# Allegro board BAROTECH.brd
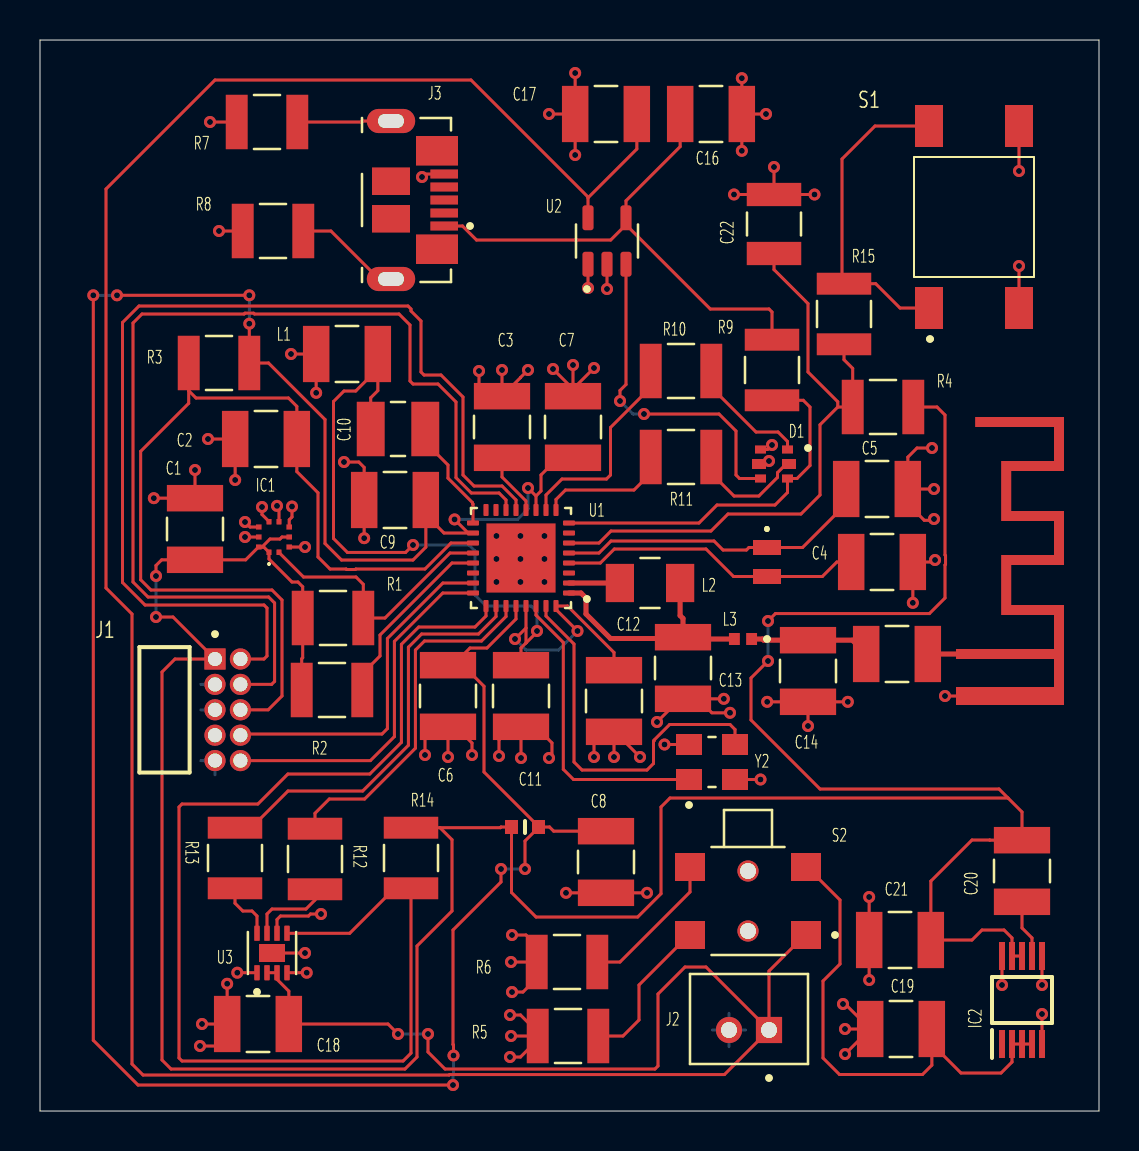
[diagram p0: board, top side]
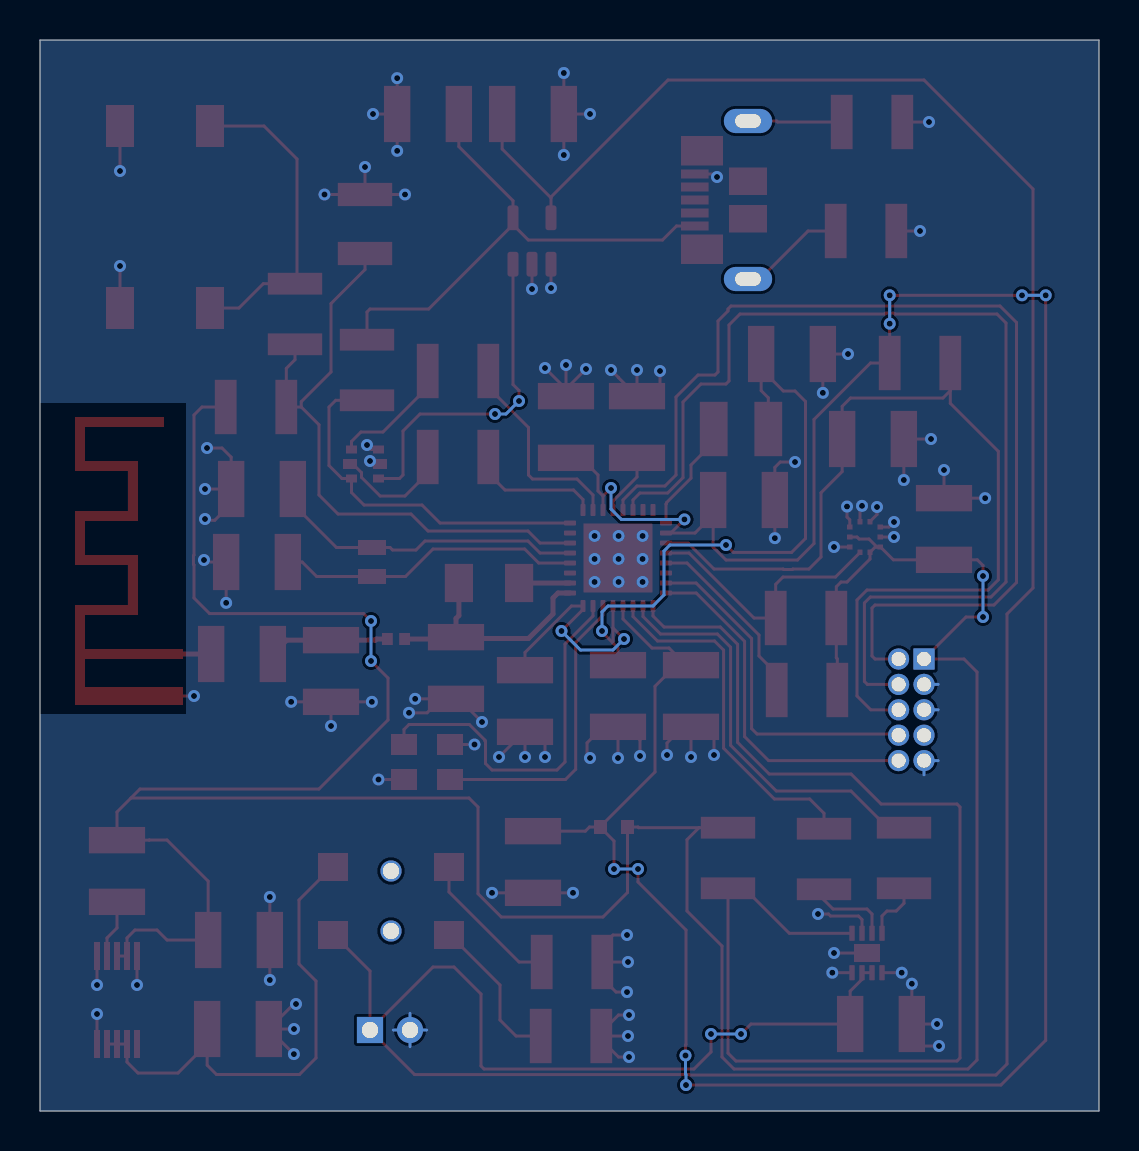
[diagram p1: board, bottom side, seen from below]

Outline 52.95 x 53.55 mm; copper layers: TOP, BOTTOM. Coordinates in mm from the lower left corner of the outline.
Outline path: 0,53.55 52.95,53.55 52.95,0 0,0 0,53.55

## Design rules (mm)
constraint set DEFAULT: min track width 0.15

## Placement (name value [footprint] x y rotation side)
A1  AN043  [AN043_PATCH_ANTENNA]  46.3 19.8 270 top
C1  100 nF  [CAPC3325X127N]  7.75 29.1 270 top
C2  100 nF  [CAPC3325X127N]  11.3 33.6 0 top
C3  1 uF  [CAPC3325X127N]  23.1 34.2 90 top
C4  12 pF  [CAPC3325X127N]  42.1 27.45 0 top
C5  12 pF  [CAPC3325X127N]  41.85 31.1 0 top
C6  100 nF  [CAPC3325X127N]  20.4 20.75 90 top
C7  100 nF  [CAPC3325X127N]  26.65 34.2 270 top
C8  10 uF  [CAPC3325X127N]  28.3 12.45 90 top
C9  100 nF  [CAPC3325X127N]  17.75 30.55 0 top
C10  10 uF  [CAPC3325X127N]  15.35 37.85 0 top
C11  100 nF  [CAPC3325X127N]  24.05 20.75 90 top
C12  100 nF  [CAPC3325X127N]  28.7 20.5 90 top
C13  1.2 pF  [CAPC3325X127N]  32.15 22.15 90 top
C14  1.2 pF  [CAPC3325X127N]  38.4 22 90 top
C15  12 pF  [CAPC3325X127N]  42.85 22.85 0 top
C16  1 uF  [CAPC3325X127N]  33.55 49.85 180 top
C17  1 uF  [CAPC3325X127N]  28.3 49.85 0 top
C18  100 nF  [CAPC3325X127N]  10.9 4.35 180 top
C19  10 uF  [CAPC3325X127N]  43.05 4.1 0 top
C20  330 nF  [CAPC3325X127N]  49.1 12 90 top
C21  10 uF  [CAPC3325X127N]  43 8.55 0 top
C22  100 nF  [CAPC3225X88N]  36.7 44.35 90 top
D1  LED RGB  [LED_19-337CRSBHGHC-A884T]  36.7 32.35 0 top
FB1  BLM18HE152SN1D  [BLM18SP221SN1B]  24.25 14.2 180 top
IC1  -  [BMP390]  11.7 28.7 180 top
IC2  MAX1759EUB+  [SOP50P490X110-10N]  49.1 5.55 90 top
J1  FTSH-105-01-L-D-RA-K  [SAMTEC_FTSH-105-01-L-D-RA-K]  8.75 22.6 90 top
J2  B2B-PH-K-S  [JST_B2B-PH-K-S]  35.45 4.6 0 top
J3  105164-0001  [MOLEX_105164-0001]  16.1 45.55 270 top
L1  10 uH  [INDC3225X170N]  17.9 34.1 180 top
L2  15 nH  [INDM3225X240N]  30.5 26.4 0 top
L3  2 nH  [INDC1005X55N]  35.15 23.6 0 top
R1  10 kOhm  [RESC3225X60N]  14.65 24.65 0 top
R2  10 kOhm  [RESC3225X60N]  14.6 21.05 180 top
R3  100 kOhm  [RESC3225X60N]  8.95 37.4 0 top
R4  10 kOhm  [RESC3225X60N]  42.15 35.2 0 top
R5  33 kOhm  [RESC3225X60N]  26.4 3.75 0 top
R6  33 kOhm  [RESC3225X60N]  26.35 7.45 180 top
R7  33 kOhm  [RESC3225X60N]  11.35 49.45 0 top
R8  33 kOhm  [RESC3225X60N]  11.65 44 0 top
R9  200 Ohm  [RESC3225X60N]  36.6 37.05 270 top
R10  82 Ohm  [RESC3225X60N]  32.05 37 180 top
R11  110 Ohm  [RESC3225X60N]  32.05 32.7 180 top
R12  22 Ohm  [RESC3225X60N]  13.75 12.6 270 top
R13  22 Ohm  [RESC3225X60N]  9.75 12.65 270 top
R14  3.3 kOhm  [RESC3225X60N]  18.55 12.65 90 top
R15  330 Ohm  [RESC3225X60N]  40.2 39.85 270 top
S1  -  [LL3301NF065QG]  46.7 44.7 90 top
S2  TL3901AGQF180  [SW_TL3901AGQF180]  35.4 10.5 90 top
U1  CC2640R2FRHBR  [IC_CC2640R2FRHBR]  24.05 27.65 180 top
U2  MAX1555EZK+T  [SOT95P275X110-5N]  28.35 43.5 90 top
U3  MAX17048G+T10  [SON50P200X200X80-9N]  11.6 7.9 90 top
Y1  32.768 kHz  [ABS06]  36.35 27.45 270 top
Y2  24 MHz  [XTAL_ABM8-24000MHZ-D-2-Y-T]  33.6 17.45 90 top

## Library data of the parts
A1 = AN043
C1 C2 C6 C7 C9 C11 C12 C18 = 12102C104KAT2A
C3 C16 C17 = 12105C105KAT2A
C4 C5 C15 = 12102U120JAT2A
C8 C10 C19 C21 = 12103C106KAT2A
C13 C14 C22 = C1210C129D8HAC7800
C20 = 12103C334KAT2A
D1 = 19-337CRSBHGHC-A884T
FB1 = BLM18HE152SN1D
IC1 = BMP390
IC2 = MAX1759EUB+
J1 = FTSH-105-01-L-D-RA-K
J2 = B2B-PH-K-S
J3 = 105164-0001
L1 = BRL3225T100K
L2 = NLV32T-015J-EF
L3 = LQG15HN2N0S02D
R1-R3 = CRCW121010K0JNEA
R4 R14 R15 = CRCW12103K30JNEA
R5-R8 = CRCW121033K0JNEA
R9 = CRCW1210200RFKEA
R10 = CRCW121082R0JNEA
R11 = CRCW1210110RFKEA
R12 R13 = CRCW121022R0JNEA
S1 = LL3301NF065QG
S2 = TL3901AGQF180
U1 = CC2640R2FRHBR
U2 = MAX1555EZK+T
U3 = MAX17048G+T10_0
Y1 = ABS06-32.768KHZ-T
Y2 = ABM8-24000MHZ-D-2-Y-T

## Footprints (pads in the part's own frame, mm; a bottom-side part is the same pattern mirrored in y, then rotated)
ABS06
  rect 0.75x1.4 smd: 1(-0.725,0) 2(0.725,0)
AN043_PATCH_ANTENNA
  rect 0.9x0.5 smd: 1(-0.95,-0.25)
  rect 0.5x0.5 smd: 2(-3.05,-0.25)
BLM18SP221SN1B
  rect 0.65x0.7 smd: 1(-0.675,0) 2(0.675,0)
BMP390
  rect 0.25x0.275 smd: 1(0.25,0.763) 2(-0.25,0.763) 6(-0.25,-0.763) 7(0.25,-0.763)
  rect 0.275x0.25 smd: 3(-0.762,0.5) 4(-0.762,0) 5(-0.762,-0.5) 8(0.762,-0.5) 9(0.762,0) 10(0.762,0.5)
CAPC3225X88N
  rect 1.16x2.72 smd: 1(-1.475,0) 2(1.475,0)
CAPC3325X127N
  rect 1.32x2.81 smd: 1(-1.542,0) 2(1.542,0)
IC_CC2640R2FRHBR
  custom 0.6x0.25 smd: 1(-2.4,1.75) 2(-2.4,1.25) 3(-2.4,0.75) 4(-2.4,0.25) 5(-2.4,-0.25) 6(-2.4,-0.75) 7(-2.4,-1.25) 8(-2.4,-1.75) 17(2.4,-1.75) 18(2.4,-1.25) 19(2.4,-0.75) 20(2.4,-0.25) 21(2.4,0.25) 22(2.4,0.75) 23(2.4,1.25) 24(2.4,1.75)
  custom 0.25x0.6 smd: 9(-1.75,-2.4) 10(-1.25,-2.4) 11(-0.75,-2.4) 12(-0.25,-2.4) 13(0.25,-2.4) 14(0.75,-2.4) 15(1.25,-2.4) 16(1.75,-2.4) 25(1.75,2.4) 26(1.25,2.4) 27(0.75,2.4) 28(0.25,2.4) 29(-0.25,2.4) 30(-0.75,2.4) 31(-1.25,2.4) 32(-1.75,2.4)
  rect 3.45x3.45 smd: 33(0,0)
INDC1005X55N
  rect 0.54x0.6 smd: 1(-0.432,0) 2(0.432,0)
INDC3225X170N
  rect 1.39x2.72 smd: 1(-1.365,0) 2(1.365,0)
INDM3225X240N
  rect 1.41x1.91 smd: 1(-1.505,0) 2(1.505,0)
JST_B2B-PH-K-S
  rect 1.308x1.308 hole 0.8: 1(1,-0.55)
  round 1.308 hole 0.8: 2(-1,-0.55)
LED_19-337CRSBHGHC-A884T
  rect 0.55x0.4 smd: 1(0.675,0.725) 2(-0.675,0.725) 5(0.675,-0.725) 6(-0.675,-0.725)
  rect 0.7x0.5 smd: 3(0.75,0) 4(-0.75,0)
LL3301NF065QG
  rect 2.1x1.4 smd: 1(-4.55,2.25) 2(4.55,2.25) 3(-4.55,-2.25) 4(4.55,-2.25)
MOLEX_105164-0001
  rect 0.45x1.38 smd: 1(1.3,4.11) 2(0.65,4.11) 3(0,4.11) 4(-0.65,4.11) 5(-1.3,4.11)
  oval 1.208x2.416 hole 0.7x1.3: SH1(-3.95,1.45) SH6(3.95,1.45)
  rect 1.475x2.1 smd: SH2(-2.462,3.75) SH5(2.462,3.75)
  rect 1.375x1.9 smd: SH3(-0.938,1.45) SH4(0.938,1.45)
RESC3225X60N
  rect 1.09x2.72 smd: 1(-1.515,0) 2(1.515,0)
SAMTEC_FTSH-105-01-L-D-RA-K
  rect 1.06x1.06 hole 0.71: 01(0,0)
  round 1.06 hole 0.71: 02(0,-1.27) 03(-1.27,0) 04(-1.27,-1.27) 05(-2.54,0) 06(-2.54,-1.27) 07(-3.81,0) 08(-3.81,-1.27) 09(-5.08,0) 10(-5.08,-1.27)
SON50P200X200X80-9N
  custom 0.76x0.27 smd: 1(-0.985,0.75) 2(-0.985,0.25) 3(-0.985,-0.25) 4(-0.985,-0.75) 5(0.985,-0.75) 6(0.985,-0.25) 7(0.985,0.25) 8(0.985,0.75)
  rect 0.9x1.3 smd: 9(0,0)
SOP50P490X110-10N
  rect 1.4x0.3 smd: 1(-2.2,1) 2(-2.2,0.5) 3(-2.2,0) 4(-2.2,-0.5) 5(-2.2,-1) 6(2.2,-1) 7(2.2,-0.5) 8(2.2,0) 9(2.2,0.5) 10(2.2,1)
SOT95P275X110-5N
  custom 1.24x0.55 smd: 1(-1.16,0.95) 2(-1.16,0) 3(-1.16,-0.95) 4(1.16,-0.95) 5(1.16,0.95)
SW_TL3901AGQF180
  round 1.06 hole 0.8 unplated: (-1.5,0) (1.5,0)
  rect 1.4x1.5 smd: 1(-1.7,-2.9) 2(1.7,-2.9) 3(-1.7,2.9) 4(1.7,2.9)
XTAL_ABM8-24000MHZ-D-2-Y-T
  rect 1.05x1.3 smd: 1(-0.875,1.15) 2(-0.875,-1.15) 3(0.875,-1.15) 4(0.875,1.15)

## Nets
DVCC: C1.2 C20.2 C21.2 FB1.2 IC1.1 IC1.4 IC1.10 IC2.8 IC2.9 J1.01 R1.1 R2.2 R4.2 R14.2
GND_SIGNAL: A1.1 C1.1 C2.1 C3.2 C4.2 C5.2 C6.1 C7.1 C8.1 C9.1 C10.1 C11.1 C12.1 C13.1 C14.1 C16.1 C17.1 C18.2 C19.1 C21.1 C22.2 D1.2 D1.4 IC1.3 IC1.5 IC1.6 IC1.7 IC1.8 IC1.9(VSS_3) IC2.5 IC2.6 IC2.10 J1.03 J1.05 J1.09 J2.2 J3.5 R5.1 R6.2 R7.1 R8.1 S1.3 S1.4 U1.33 U2.1(USB) U2.2 U3.1 U3.4 U3.6 U3.9 Y2.2 Y2.4(GND#4)
VDDR: C10.2 C11.2 C12.2 L1.2 U1.29 U1.32
VDDS: C6.2 C7.2 C8.2 C9.2 FB1.1 R3.2 U1.11 U1.18 U1.28
ALERTN_17048: R14.1 U1.25 U3.5
BAT+: C17.2 C18.1 J2.1 S2.1 U2.5 U3.2 U3.3(VDD)
DCDC IN: C19.2 IC2.2(S\H\D\N\) IC2.3 IC2.4 S2.2
DCDC_SW: L1.1 U1.17
DIO_7: IC1.2 R1.2 U1.20
DIO_8: R2.1 U1.21
LED_BLUE: D1.5 R9.2 U1.8
LED_GREEN: R10.2 U1.10
LED_RED: R11.2 U1.9
RF_N: L2.1 U1.2
RF_P: C13.2 L2.2 L3.1 U1.1
RST: C2.2 J1.06 R3.1 U1.19
RST_BUTTON: C22.1 R4.1 R15.2 U1.6
SCL_17048: R12.1 U1.27
SDA_17048: R13.1 U1.26
TCKC: J1.04 U1.14
TDI: J1.10 U1.24
TDO: J1.08 U1.23
TMSC: J1.02 U1.13
N107724: C3.1 U1.12
N108006: U1.31 Y2.3
N108014: U1.30 Y2.1
N108078: C4.1 U1.4 Y1.2
N108106: C5.1 U1.5(X32K_Q2) Y1.1
N110114: C14.2 C15.1 L3.2
N110126: A1.2(-) C15.2
N110290: R15.1 S1.1 S1.2
N114057: C16.2 J3.1 R9.1 U2.4
N114261: J3.SH1 R7.2
N114297: D1.6 U2.3
N114323: J3.SH6(SHIELD__5) R8.2
N114455: R6.1 S2.4
N114863: C20.1 IC2.7
N115009: R12.2 U3.7
N115053: R13.2 U3.8
N1141430: D1.1 R10.1
N1141432: D1.3(R_C) R11.1
N1143552: R5.2 S2.3

Pads without a net: IC2 1; J1 07; J3 2 3 4 SH2 SH3 SH4 SH5; U1 3 7 15 16 22

## Via types
v1: diameter 0.6, hole 0.3, TOP to BOTTOM, 115 vias

## Routing (per net, layer and track width the routed paths; a pad name or vN(x,y) marks a point on that pad's centre or on a via; arc(x,y) is an arc through that point)
DVCC: length 165.1
  TOP w0.15: 48.4,15.65 49.1,14.95 C20.2 47.49,13.54 47.48,13.55 46.6,13.55 44.54,11.49 C21.2 46.6,8.55 47.1,9.05 48.2,9.05 48.6,8.65 IC2.9 IC2.8 ; 48.4,15.65 31.5,15.65 31.05,15.2 31.05,10.87 29.88,9.7 24.8,9.7 23.57,10.93 FB1.2 23.05,14.2 23.01,14.17 20,14.17 ; 48.4,15.65 47.95,16.1 39,16.1 35.55,19.55 35.55,21.65 v1(36.4,22.5) ; R4.2 44.85,35.2 45.25,34.8 45.25,27.79 45.28,27.77 45.28,27.33 45.25,27.31 45.25,25.65 44.47,24.87 36.77,24.87 v1(36.4,24.5) ; 11.1,28.2 11.19,28.2 IC1.1 11.45,27.6 12.6,26.45 12.9,26.45 13.14,26.21 R1.1 13.14,22.66 13.09,22.61 R2.2 ; 11.1,28.2 11.5,28.6 12,28.6 12.1,28.7 IC1.4 ; 11.1,28.2 IC1.10 10.93,28.2 10.28,27.56 C1.2 6.08,27.56 5.8,27.28 v1(5.8,26.75) ; v1(5.8,24.7) 6.65,24.7 J1.01 6.75,22.6 6.1,21.95 6.1,2.55 6.55,2.1 18.25,2.1 18.85,2.7 18.85,8.25 20.6,10 20.6,13.57 20,14.17 ; 20,14.17 R14.2
  BOTTOM w0.15: v1(36.4,24.5) v1(36.4,22.5) ; v1(5.8,26.75) v1(5.8,24.7)
GND_SIGNAL: length 145.5
  TOP w0.15: 36.7,45.83 v1(34.7,45.83) ; 36.7,45.83 v1(38.73,45.83) ; 36.7,45.83 v1(36.7,47.2) ; v1(44.75,27.55) 44.75,27.55 44.65,27.45 C4.2 v1(43.64,25.41) ; v1(9.76,31.55) C2.1 v1(8.4,33.6) ; v1(35.09,48.01) C16.1 ; C16.1 v1(36.3,49.85) ; C16.1 v1(35.09,51.64) ; v1(23.1,37.05) C3.2 ; C3.2 24.03,36.67 24.03,36.68 v1(24.4,37.05) ; C3.2 22.36,35.74 21.95,36.15 v1(21.95,37) ; v1(36.45,32.5) 36.3,32.35 D1.4 ; Y2.4 v1(31.23,18.33) ; v1(19.1,46.7) 19.25,46.85 J3.5 ; IC1.6 11.95,30.16 v1(11.85,30.26) ; U3.4 v1(13.34,6.91) ; 24.75,3.75 24.75,3.43 24.03,2.7 v1(23.5,2.7) ; 24.75,3.75 24.8,3.75 ; 24.75,3.75 v1(23.55,3.75) ; C6.1 19.86,19.21 19.25,18.6 v1(19.25,17.8) ; C6.1 v1(20.4,17.7) ; C6.1 20.79,19.21 21.6,18.4 v1(21.6,17.8) ; v1(40.15,5.35) 40.26,5.35 C19.1 ; C12.1 27.96,18.96 27.7,18.7 v1(27.7,17.7) ; C12.1 v1(28.7,17.7) ; C12.1 28.74,18.96 v1(30,17.7) ; 24.84,7.45 v1(23.55,7.45) ; 24.84,7.45 24.84,6.64 24.15,5.95 v1(23.6,5.95) ; 24.84,7.45 24.84,8.27 24.3,8.8 v1(23.6,8.8) ; C18.2 v1(9.36,6.36) ; C18.2 v1(8.1,4.35) ; C18.2 9.36,3.61 9,3.25 v1(8,3.25) ; v1(30.35,10.91) C8.1 v1(26.3,10.91) ; S1.4 v1(48.95,47) ; C14.1 v1(38.4,19.25) ; C14.1 v1(36.36,20.46) ; C14.1 v1(40.39,20.46) ; C19.1 v1(40.25,2.85) ; C19.1 v1(40.25,4.1) ; v1(10.25,29.45) 10.5,29.2 IC1.8 ; v1(26.76,51.9) C17.1 ; C17.1 v1(26.76,47.8) ; C17.1 v1(25.45,49.85) ; C7.1 26.65,36.1 ; 26.65,36.1 v1(27.7,37.15) ; 26.65,36.1 v1(26.65,37.3) ; 26.65,36.1 v1(25.65,37.1) ; IC1.7 11.45,29.48 11.1,29.83 v1(11.1,30.2) ; 24.8,3.75 R5.1 ; 24.8,3.75 24.8,4.03 24.03,4.8 v1(23.5,4.8) ; C11.1 23.61,19.21 22.95,18.55 v1(22.95,17.75) ; C11.1 v1(24.05,17.65) ; C11.1 24.8,19.21 25.6,18.41 25.6,17.8 v1(25.45,17.65) ; v1(12.6,30.22) 12.6,29.7 12.46,29.56 IC1.5 ; R7.1 v1(8.5,49.45) ; v1(44.7,31.1) C5.2 ; C5.2 43.39,30.36 44.21,29.54 44.64,29.54 v1(44.7,29.6) ; C5.2 43.39,32.69 43.85,33.15 v1(44.6,33.15) ; IC2.6 v1(50.1,6.3) ; Y2.2 v1(36.02,16.58) ; R8.1 v1(8.95,44) ; S1.3 v1(48.95,42.25) ; 32.9,20.61 v1(34.19,20.61) ; 32.9,20.61 C13.1 32.01,20.61 v1(30.85,19.45) ; 32.9,20.61 33.59,19.91 v1(34.5,19.91) ; v1(27.4,41.15) U2.1 ; 11.85,8.8 U3.6 11.85,9.57 12.03,9.75 13.43,9.75 13.53,9.85 v1(14.05,9.85) ; U3.1 v1(9.87,6.91) ; IC2.10 v1(48.1,6.3) ; v1(7.75,32.05) C1.1 v1(5.69,30.64) ; 36.02,33.08 36.38,33.08 v1(36.6,33.3) ; IC2.5 v1(50.1,4.85) ; v1(41.46,10.7) C21.1 v1(41.46,6.55) ; U3.9 v1(13.25,7.9) ; v1(15.2,32.45) 15.94,32.45 16.21,32.18 C9.1 v1(16.21,28.64) ; v1(12.55,37.85) C10.1 v1(13.81,35.91) ; IC1.9 v1(10.25,28.7) ; A1.1 v1(45.25,20.75) ; U2.2 v1(28.35,41.1) ; IC1.3 v1(13.25,28.2)
  BOTTOM w0.15: 34.45,4.88 J2.2 ; J2.2 34.45,3.22 ; J2.2 35.28,4.05 ; J2.2 33.62,4.05 ; 8.04,17.52 J1.09 8.75,16.81 ; 8.04,21.33 J1.03 ; J1.05 8.04,20.06
  vias: v1(22.82,28.75) v1(22.82,27.6) v1(22.82,26.45) v1(24.02,28.75) v1(24.02,27.6) v1(24.02,26.45) v1(25.22,28.75) v1(25.22,27.6) v1(25.22,26.45)
VDDR: length 42.7
  TOP w0.15: 24.3,23.4 24.3,23.4 24.85,23.95 v1(24.85,24) ; 24.3,23.4 24.05,23.15 C11.2 ; 24.3,23.4 24.3,24.15 ; C12.2 28.7,22.93 26.38,25.25 U1.32 25.8,25.07 v1(26.88,24) ; U1.29 24.3,24.15 ; 24.3,24.15 v1(23.75,23.6) ; 16.89,37.11 C10.2 ; 16.89,37.11 16.89,36.02 16.54,35.66 L1.2 ; 16.89,37.11 15.79,36 15.2,36 14.68,35.48 14.68,28.63 15.37,27.93 18.28,27.93 v1(18.65,28.3)
  BOTTOM w0.15: v1(18.65,28.3) 21.45,28.3 21.75,28 21.75,25.8 22.3,25.25 24.55,25.25 24.85,24.95 v1(24.85,24) ; v1(26.88,24) 25.93,23.05 24.3,23.05 v1(23.75,23.6)
VDDS: length 133.5
  TOP w0.15: v1(24.25,12.1) 24.25,13.5 24.93,14.18 FB1.1 ; v1(20.73,29.58) 21.41,28.9 ; 21.41,28.9 U1.18 ; 21.41,28.9 20.2,28.9 19.29,29.8 ; U1.28 23.8,24.6 22.35,23.15 21.5,23.15 21.14,22.79 21.14,22.29 ; 24.8,30.75 U1.11 24.8,29.9 ; 24.8,30.75 25.05,31 25.05,31.8 25.91,32.66 C7.2 ; 24.8,30.75 v1(24.4,31.15) ; v1(23.05,12.1) 23.05,11.45 20.65,9.05 20.65,3.32 20.68,3.3 v1(20.68,2.78) ; 19.29,29.8 C9.2 ; 19.29,29.8 19.29,28.19 18.65,27.55 15.08,27.55 14.25,28.38 14.25,34.58 11.43,37.4 R3.2 v1(10.46,39.37) ; 21.14,22.29 22.2,21.23 22.2,16.95 24.93,14.23 FB1.1 ; 21.14,22.29 C6.2 ; C8.2 25.68,13.99 25.48,14.2 FB1.1 ; v1(10.46,40.78) v1(3.85,40.78) ; v1(2.66,40.78) 2.66,3.54 4.9,1.3 v1(20.65,1.3)
  BOTTOM w0.15: v1(20.73,29.58) 23.88,29.58 24.4,30.1 v1(24.4,31.15) ; v1(10.46,39.37) v1(10.46,40.78) ; v1(20.65,1.3) 20.65,1.82 20.68,1.85 v1(20.68,2.78) ; v1(23.05,12.1) v1(24.25,12.1) ; v1(3.85,40.78) v1(2.66,40.78)
ALERTN_17048: length 62.4
  TOP w0.15: U1.25 22.3,24.75 21.75,24.2 18.93,24.2 18.07,23.34 18.07,18.43 16.49,16.85 12.4,16.85 10.9,15.35 7.1,15.35 6.95,15.2 6.95,2.65 7.1,2.5 18.16,2.5 18.55,2.89 18.55,11.14 17.73,11.14 15.49,8.89 U3.5
BAT+: length 152.3
  TOP w0.15: J2.1 34.22,1.82 20.48,1.82 20.46,1.8 5.15,1.8 4.6,2.35 4.6,24.85 3.3,26.15 3.3,46.1 8.75,51.55 21.55,51.55 27.4,45.7 27.4,45.66 ; J2.1 33.3,7.2 32.25,7.2 30.9,5.85 30.9,2.25 30.75,2.1 20.25,2.1 19.4,2.95 v1(19.4,3.85) ; J2.1 36.45,7 38.25,8.8 S2.1 ; 27.4,45.66 U2.5 27.4,44.55 ; 27.4,45.66 29.84,48.1 C17.2 ; 11.34,6.91 U3.2 U3.3 11.85,6.58 12.44,5.99 C18.1 17.4,4.35 v1(17.9,3.85)
  BOTTOM w0.15: v1(17.9,3.85) v1(19.4,3.85)
DCDC IN: length 25.2
  TOP w0.15: S2.2 38.35,12.2 40,10.55 40,7.35 39.15,6.5 39.15,2.65 39.98,1.82 44.12,1.82 44.59,2.29 44.59,3.36 ; 44.59,3.36 C19.2 ; 44.59,3.36 46.05,1.9 48.05,1.9 48.6,2.45 IC2.2 IC2.3 IC2.4
DCDC_SW: length 5.7
  TOP w0.15: U1.17 21.65,30.35 21.62,30.38 21.62,30.42 20.4,31.64 20.4,32.3 19.27,33.44 L1.1
DIO_7: length 13.4
  TOP w0.15: IC1.2 11.95,27.92 13.17,26.7 15.8,26.7 16.16,26.34 R1.2 17.25,24.65 20.5,27.9 U1.20
DIO_8: length 9.3
  TOP w0.15: 16.12,21.05 16.12,21.87 17,22.75 17,23.8 20.6,27.4 U1.21 21.7,27.4
LED_BLUE: length 18.7
  TOP w0.15: 26.35,29.4 U1.8 32.95,29.4 33.85,30.3 36.75,30.3 37.38,30.93 37.38,31.62 37.85,31.62 38.5,32.27 38.5,35.2 38.16,35.53 R9.2
LED_GREEN: length 10.5
  TOP w0.15: 25.3,30 U1.10 25.3,30.8 26.1,31.6 28.33,31.6 28.53,31.8 28.53,34.17 30.54,36.19 R10.2
LED_RED: length 6.6
  TOP w0.15: U1.9 25.8,30.57 26.28,31.05 29.7,31.05 30.54,31.89 R11.2
RF_N: length 2.5
  TOP w0.25: 29,26.4 U1.2
RF_P: length 12.6
  TOP w0.25: U1.1 27.05,25.9 27.3,25.65 27.3,24.85 28.53,23.62 32.15,23.62 ; L2.2 32.01,24.77 32.15,24.63 C13.2 32.15,23.62 ; 34.77,23.6 L3.1 32.17,23.6 32.15,23.62
RST: length 48.7
  TOP w0.15: J1.06 11.41,20.06 12.1,20.75 12.1,25.55 11.6,26.05 5.55,26.05 5.03,26.56 5.03,32.98 7.44,35.39 7.44,36.02 ; 7.44,36.02 R3.1 ; 7.44,36.02 7.8,35.65 12.42,35.65 12.84,35.23 C2.2 12.84,31.97 13.9,30.91 13.9,27.7 14.5,27.1 15.31,27.1 15.33,27.07 15.77,27.07 15.79,27.1 19.25,27.1 20.55,28.4 U1.19
RST_BUTTON: length 31.4
  TOP w0.15: 39.89,35.2 R4.1 40.64,37.13 40.2,37.56 R15.2 ; 39.89,35.2 39,34.31 39,30.8 38.05,29.85 34.4,29.85 33.55,29 28.55,29 27.95,28.4 U1.6 ; 39.89,35.2 39.89,35.46 38.4,36.95 38.4,40.37 36.7,42.07 C22.1
SCL_17048: length 17.8
  TOP w0.15: U1.27 23.3,24.73 22.07,23.5 19.22,23.5 18.77,23.05 18.77,18.14 16.23,15.6 14.46,15.6 13.75,14.89 R12.1
SDA_17048: length 20.8
  TOP w0.15: U1.26 22.8,24.73 21.93,23.85 19.08,23.85 18.42,23.19 18.42,18.29 16.14,16 12.4,16 10.57,14.17 R13.1
TCKC: length 53.2
  TOP w0.15: U1.14 23.3,30.55 22.95,30.9 21.57,30.9 20.8,31.67 20.8,35.45 19.9,36.35 18.65,36.35 18.5,36.5 18.5,39.3 17.95,39.85 10.72,39.85 10.68,39.89 10.25,39.89 10.21,39.85 5.1,39.85 4.65,39.4 4.65,26.45 5.4,25.7 11.43,25.7 11.73,25.4 11.73,21.48 11.58,21.33 J1.04
TDI: length 18
  TOP w0.15: J1.10 16.52,17.52 17.72,18.72 17.72,23.48 20.14,25.9 U1.24 21.8,25.9
TDO: length 17.5
  TOP w0.15: 21.75,26.4 U1.23 20.14,26.4 17.37,23.63 17.37,19.12 17.1,18.85 10.08,18.85 J1.08
TMSC: length 52.9
  TOP w0.15: J1.02 11.2,22.6 11.35,22.75 11.35,25.15 11.2,25.3 5.25,25.3 4.12,26.43 4.12,39.42 4.95,40.25 18.4,40.25 18.55,40.1 18.55,40 19.05,39.5 19.05,36.95 19.2,36.8 20.05,36.8 21.15,35.7 21.15,31.8 21.7,31.25 23.1,31.25 23.8,30.55 U1.13
N107724: length 3.1
  TOP w0.15: U1.12 24.3,30.5 23.1,31.7 C3.1
N108006: length 19.1
  TOP w0.15: U1.31 25.3,24.75 26.7,23.35 26.7,17.45 27.1,17.05 30.35,17.05 30.68,17.38 30.68,18.48 30.7,18.5 30.7,18.54 31.48,19.33 34.5,19.33 34.75,19.08 Y2.3
N108014: length 15.2
  TOP w0.15: U1.30 24.8,24.79 26.16,23.43 26.16,17.09 26.68,16.58 Y2.1
N108078: length 15.5
  TOP w0.15: 40.73,27.45 C4.1 39.84,27.45 39.12,26.73 34.67,26.73 33.3,28.1 28.72,28.1 28.02,27.4 U1.4 26.4,27.4
N108106: length 16
  TOP w0.15: U1.5 27.95,27.9 28.55,28.5 33.7,28.5 34.15,28.05 35.32,28.05 35.45,28.18 Y1.1 38.13,28.18 40.31,30.36 C5.1
N110114: length 6
  TOP w0.25: C15.1 40.62,23.54 C14.2 36.19,23.54 36.13,23.6 L3.2
N110126: length 1.7
  TOP w0.25: A1.2 C15.2
N110290: length 16.2
  TOP w0.15: S1.2 41.75,49.25 40.1,47.6 40.1,41.47 40.2,41.37 41.78,41.37 43,40.15 S1.1 44.6,40.15
N114057: length 26.8
  TOP w0.15: 29.3,44.32 33.52,40.1 36.45,40.1 36.6,39.95 R9.1 ; 29.3,44.32 U2.4 29.3,45.51 32.01,48.22 C16.2 ; 29.3,44.32 28.53,43.55 21.83,43.55 21.12,44.25 J3.1
N114261: length 4.7
  TOP w0.15: R7.2 16.07,49.45 16.12,49.5 J3.SH1
N114297: length 16.9
  TOP w0.15: D1.6 34.98,31.62 34.8,31.8 34.8,34 33.95,34.85 v1(30.2,34.85) ; v1(29,35.5) 29,36.02 29.3,36.33 U2.3
  BOTTOM w0.15: v1(29,35.5) 29.65,34.85 v1(30.2,34.85)
N114323: length 5.4
  TOP w0.15: J3.SH6 16.95,41.6 14.55,44 R8.2
N114455: length 7.3
  TOP w0.15: S2.4 32.5,10.95 29,7.45 R6.1
N114863: length 2.9
  TOP w0.15: IC2.7 49.6,8.65 49.1,9.15 C20.1
N115009: length 4.3
  TOP w0.15: 11.35,8.8 U3.7 11.35,9.85 11.6,10.1 13.3,10.1 13.75,10.55 R12.2
N115053: length 3
  TOP w0.15: 9.75,11.14 9.75,10.39 10.14,10 10.6,10 10.85,9.75 U3.8 10.85,8.85
N1141430: length 6.1
  TOP w0.15: R10.1 33.56,36.19 35.8,33.95 36.9,33.95 37.38,33.48 37.38,33.08
N1141432: length 6
  TOP w0.15: R11.1 33.56,31.89 34.7,30.75 35.94,30.75 36.88,31.68 36.88,31.92 37.31,32.35 D1.3
N1143552: length 7.7
  TOP w0.15: S2.3 32.45,8.8 29.95,6.3 29.95,4.55 29.15,3.75 R5.2

## Copper pours and planes (outline as drawn; the poured copper is in the pictures)
GND_SIGNAL on BOTTOM: 52.95,53.55 52.95,35.4 45.65,35.4 45.65,19.85 52.95,19.85 52.95,0 0,0 0,53.55
N110126 on TOP (solid shape): 51.2,32 48.56,32 48.56,30 51.2,30 51.2,27.3 48.56,27.3 48.56,25.3 51.2,25.3 51.2,20.3 46.3,20.3 46.3,21.2 50.7,21.2 50.7,22.6 46.3,22.6 46.3,23.1 50.7,23.1 50.7,24.8 48.06,24.8 48.06,27.8 50.7,27.8 50.7,29.5 48.06,29.5 48.06,32.5 50.7,32.5 50.7,34.2 46.76,34.2 46.76,34.7 51.2,34.7
